# EAGLE board working (EAGLE 6.3), part 1 of 3
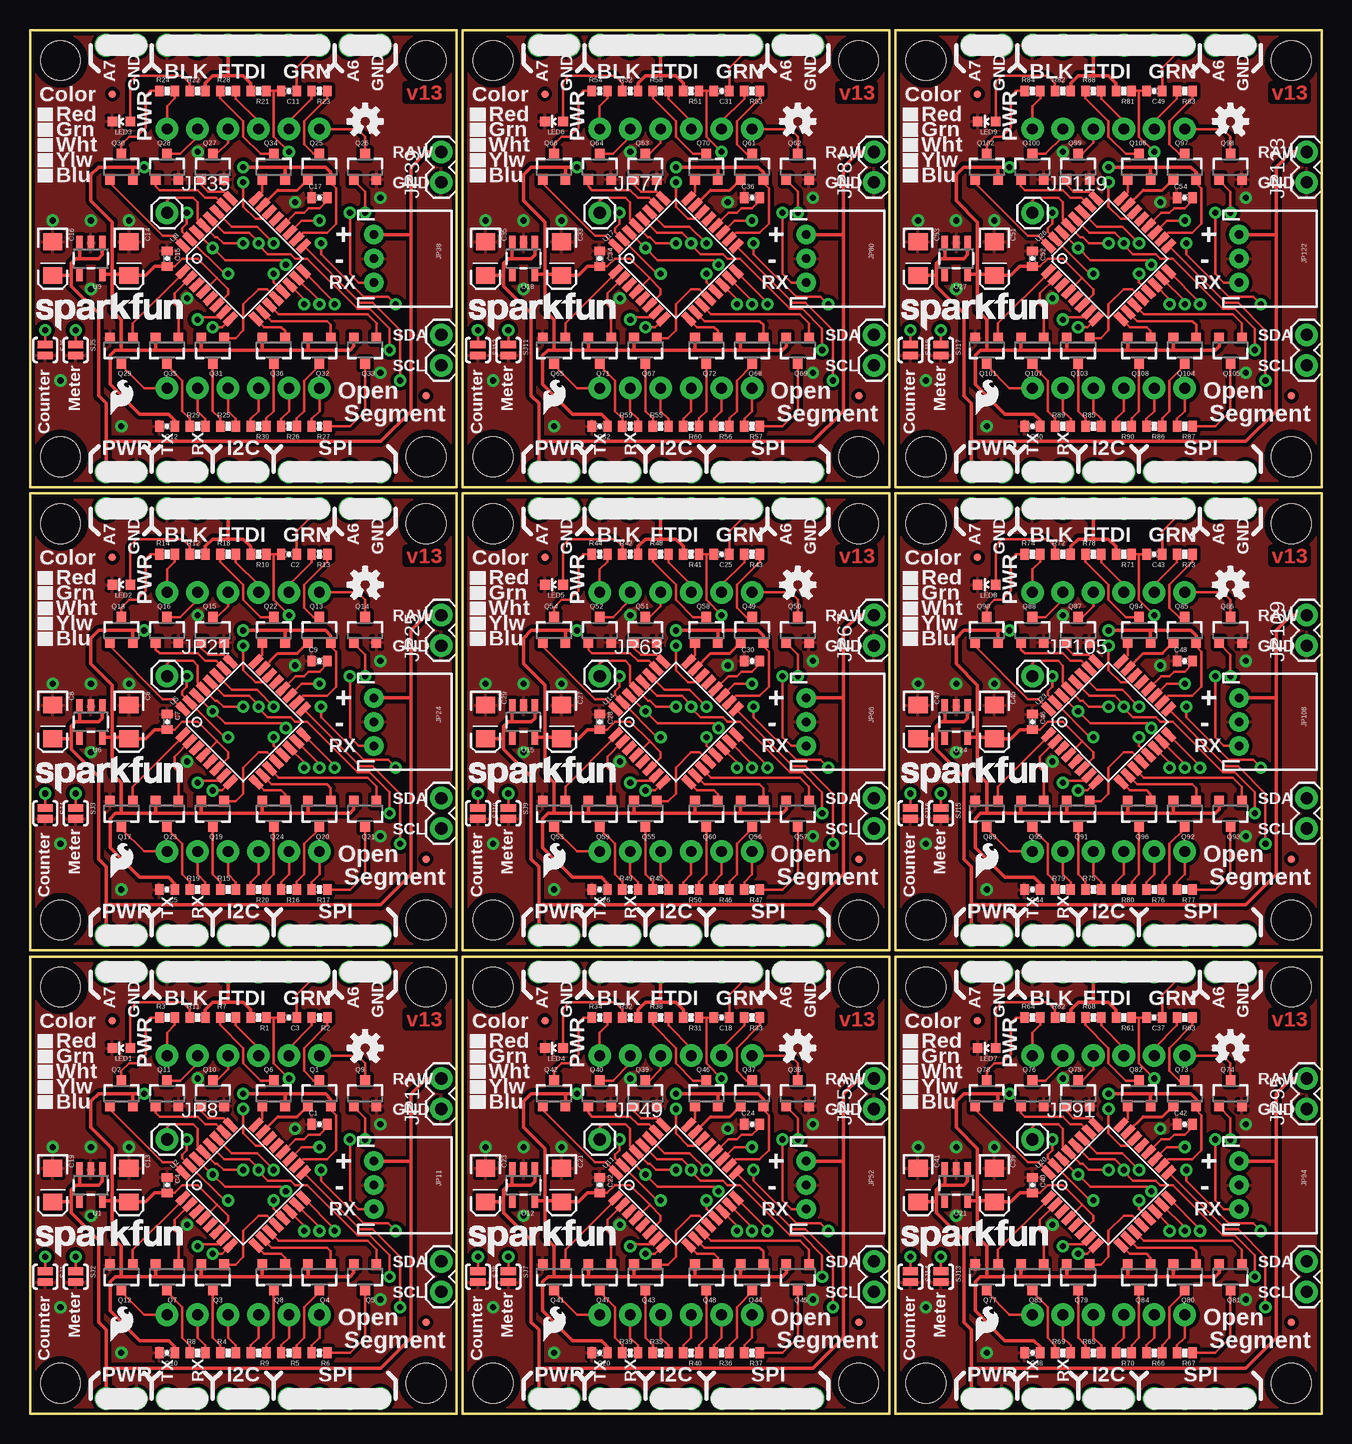
[diagram p0: board, top side]
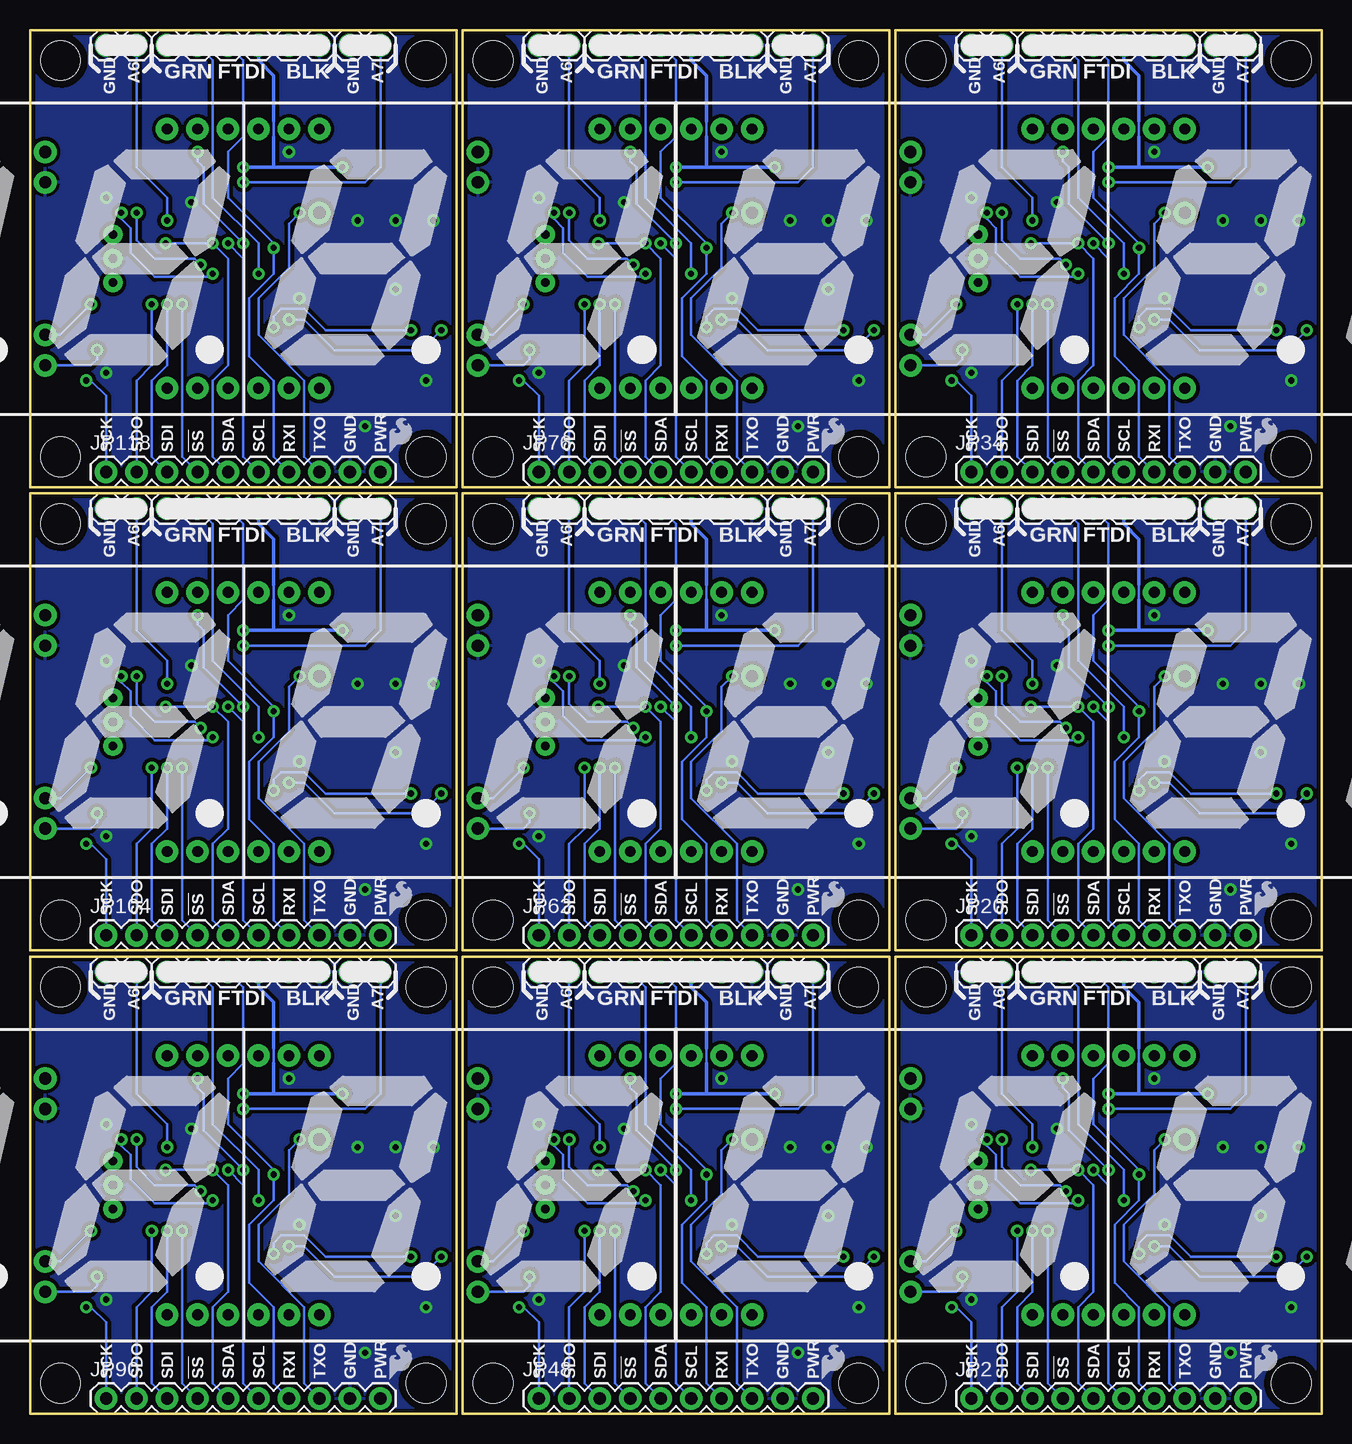
[diagram p1: board, bottom side, seen from below]

Size 107.7 x 115.32 mm. Coordinates in mm from the lower left corner, seen from the top.
Outline: 35.56,38.1 35.56,0 0,0 0,38.1 35.56,38.1
Outline: 35.56,76.71 35.56,38.61 0,38.61 0,76.71 35.56,76.71
Outline: 35.56,115.32 35.56,77.22 0,77.22 0,115.32 35.56,115.32
Outline: 71.63,38.1 71.63,0 36.07,0 36.07,38.1 71.63,38.1
Outline: 71.63,76.71 71.63,38.61 36.07,38.61 36.07,76.71 71.63,76.71
Outline: 71.63,115.32 71.63,77.22 36.07,77.22 36.07,115.32 71.63,115.32
Outline: 107.7,38.1 107.7,0 72.14,0 72.14,38.1 107.7,38.1
Outline: 107.7,76.71 107.7,38.61 72.14,38.61 72.14,76.71 107.7,76.71
Outline: 107.7,115.32 107.7,77.22 72.14,77.22 72.14,115.32 107.7,115.32
Copper layers (1*16): Top 0.035mm / dielectric 1.5mm / Bottom 0.035mm
Design rules "default": minimum track width 8mil, minimum drill 20mil, track to track 8mil, track to pad 8mil, pad to pad 8mil, via to via 8mil, smd to smd 8mil, copper to edge 10mil, drill to drill 8mil, minimum pad ring 12mil, minimum via ring 10mil, stop-mask expansion 4mil, vias tented up to drill 20mil, thermal gap 10mil
Net classes: 0 default: width 0.203 mm

## Footprints (pad centres in the part's own frame; a part is rotated, then mirrored left to right if it is on the bottom)
0402-CAP = smd 0.7 x 0.9: 1 -0.65,0; 2 0.65,0
EIA3216 = smd 1.4 x 1.6: A 1.4,0; C -1.4,0
FTDI_BASIC = drill 1.016 pad 1.88: CTS 10.16,0; DTR 0,0; GND 12.7,0; RXI 2.54,0; TXO 5.08,0; VCC 7.62,0
1X10 = drill 1.016 pad 1.88: 1 0,0; 2 2.54,0; 3 5.08,0; 4 7.62,0; 5 10.16,0; 6 12.7,0; 7 15.24,0; 8 17.78,0; 9 20.32,0; 10 22.86,0
STAND-OFF = hole 3.302: 0,0
MICRO-FIDUCIAL = smd 0.635 x 0.635: 1 0,0
1X01 = drill 1.016 pad 1.88: 1 0,0
1X02 = drill 1.016 pad 1.88: 1 0,0; 2 2.54,0
JST-3-PTH = drill 0.7 pad 1.626: 1 -2,-5; 2 0,-5; 3 2,-5
LED-0603 = smd 0.8 x 0.8: A 0,-0.75; C 0,0.75
SOT23-3 = smd 0.8 x 0.9: 1 -0.95,-1; 2 0.95,-1; 3 0,1.1
0402-RES = smd 0.7 x 0.9: 1 -0.65,0; 2 0.65,0
SJ_2S-NO = smd 0.635 x 1.27: 1 -0.45,0; 2 0.45,0
SOT23-5 = smd 0.55 x 1.2: 1 -0.95,-1.3; 2 0,-1.3; 3 0.95,-1.3; 4 0.95,1.3; 5 -0.95,1.3
TQFP32-08 = smd 1.27 x 0.559: 1 -4.293,2.8; 2 -4.293,2; 3 -4.293,1.2; 4 -4.293,0.4; 5 -4.293,-0.4; 6 -4.293,-1.2; 7 -4.293,-2; 8 -4.293,-2.8; 17 4.293,-2.8; 18 4.293,-2; 19 4.293,-1.2; 20 4.293,-0.4; 21 4.293,0.4; 22 4.293,1.2; 23 4.293,2; 24 4.293,2.8 | smd 0.559 x 1.27: 9 -2.8,-4.293; 10 -2,-4.293; 11 -1.2,-4.293; 12 -0.4,-4.293; 13 0.4,-4.293; 14 1.2,-4.293; 15 2,-4.293; 16 2.8,-4.293; 25 2.8,4.293; 26 2,4.293; 27 1.2,4.293; 28 0.4,4.293; 29 -0.4,4.293; 30 -1.2,4.293; 31 -2,4.293; 32 -2.8,4.293
7-SEGMENT-4DIGIT-COUNTER = drill 0.9 pad 1.88: 1 -6.35,-10.795; 2 -3.81,-10.795; 3 -1.27,-10.795; 4 1.27,-10.795; 5 3.81,-10.795; 6 6.35,-10.795; 7 6.35,10.795; 8 3.81,10.795; 9 1.27,10.795; 10 -1.27,10.795; 11 -3.81,10.795; 12 -6.35,10.795

## Placement (x,y rotation side)
C1  0.1uF  [0402-CAP]  24.13,24.13 0 top
C2  0.1uF  [0402-CAP]  21.59,71.63 180 top
C3  0.1uF  [0402-CAP]  21.59,33.02 180 top
C4  0.1uF  [0402-CAP]  11.43,19.05 270 top
C5  1uF  [0402-CAP]  11.43,43.69 180 top
C6  10uF  [EIA3216]  8.26,57.66 270 top
C7  0.1uF  [0402-CAP]  11.43,57.66 270 top
C8  10uF  [EIA3216]  1.91,57.66 270 top
C9  0.1uF  [0402-CAP]  24.13,62.74 0 top
C10  1uF  [0402-CAP]  11.43,5.08 180 top
C11  0.1uF  [0402-CAP]  21.59,110.24 180 top
C12  1uF  [0402-CAP]  11.43,82.3 180 top
C13  10uF  [EIA3216]  8.26,19.05 270 top
C14  10uF  [EIA3216]  8.26,96.27 270 top
C15  0.1uF  [0402-CAP]  11.43,96.27 270 top
C16  10uF  [EIA3216]  1.91,96.27 270 top
C17  0.1uF  [0402-CAP]  24.13,101.35 0 top
C18  0.1uF  [0402-CAP]  57.66,33.02 180 top
C19  10uF  [EIA3216]  1.91,19.05 270 top
C20  1uF  [0402-CAP]  47.5,5.08 180 top
C21  10uF  [EIA3216]  44.32,19.05 270 top
C22  0.1uF  [0402-CAP]  47.5,19.05 270 top
C23  10uF  [EIA3216]  37.97,19.05 270 top
C24  0.1uF  [0402-CAP]  60.2,24.13 0 top
C25  0.1uF  [0402-CAP]  57.66,71.63 180 top
C26  1uF  [0402-CAP]  47.5,43.69 180 top
C27  10uF  [EIA3216]  44.32,57.66 270 top
C28  0.1uF  [0402-CAP]  47.5,57.66 270 top
C29  10uF  [EIA3216]  37.97,57.66 270 top
C30  0.1uF  [0402-CAP]  60.2,62.74 0 top
C31  0.1uF  [0402-CAP]  57.66,110.24 180 top
C32  1uF  [0402-CAP]  47.5,82.3 180 top
C33  10uF  [EIA3216]  44.32,96.27 270 top
C34  0.1uF  [0402-CAP]  47.5,96.27 270 top
C35  10uF  [EIA3216]  37.97,96.27 270 top
C36  0.1uF  [0402-CAP]  60.2,101.35 0 top
C37  0.1uF  [0402-CAP]  93.73,33.02 180 top
C38  1uF  [0402-CAP]  83.57,5.08 180 top
C39  10uF  [EIA3216]  80.39,19.05 270 top
C40  0.1uF  [0402-CAP]  83.57,19.05 270 top
C41  10uF  [EIA3216]  74.04,19.05 270 top
C42  0.1uF  [0402-CAP]  96.27,24.13 0 top
C43  0.1uF  [0402-CAP]  93.73,71.63 180 top
C44  1uF  [0402-CAP]  83.57,43.69 180 top
C45  10uF  [EIA3216]  80.39,57.66 270 top
C46  0.1uF  [0402-CAP]  83.57,57.66 270 top
C47  10uF  [EIA3216]  74.04,57.66 270 top
C48  0.1uF  [0402-CAP]  96.27,62.74 0 top
C49  0.1uF  [0402-CAP]  93.73,110.24 180 top
C50  1uF  [0402-CAP]  83.57,82.3 180 top
C51  10uF  [EIA3216]  80.39,96.27 270 top
C52  0.1uF  [0402-CAP]  83.57,96.27 270 top
C53  10uF  [EIA3216]  74.04,96.27 270 top
C54  0.1uF  [0402-CAP]  96.27,101.35 0 top
JP1  FTDI_BASIC  [FTDI_BASIC]  24.13,36.83 0 bottom
JP2  Connections  [1X10]  29.21,1.27 0 bottom
JP3  STAND-OFF  [STAND-OFF]  33.02,35.56 0 top
JP4  STAND-OFF  [STAND-OFF]  2.54,35.56 0 top
JP5  STAND-OFF  [STAND-OFF]  33.02,2.54 0 top
JP6  STAND-OFF  [STAND-OFF]  2.54,2.54 0 top
JP7  FIDUCIALUFIDUCIAL  [MICRO-FIDUCIAL]  6.86,32.77 0 top
JP8  RESET  [1X01]  11.43,22.86 0 top
JP9  [1X02]  29.21,36.83 0 bottom
JP10  [1X02]  8.89,36.83 0 bottom
JP11  Serial  [JST-3-PTH]  33.66,19.05 270 top
JP12  [1X02]  34.29,25.4 90 top
JP13  [1X02]  34.29,12.7 270 top
JP14  FIDUCIALUFIDUCIAL  [MICRO-FIDUCIAL]  33.02,7.62 0 top
JP15  FTDI_BASIC  [FTDI_BASIC]  24.13,75.44 0 bottom
JP16  STAND-OFF  [STAND-OFF]  33.02,74.17 0 top
JP17  STAND-OFF  [STAND-OFF]  2.54,74.17 0 top
JP18  STAND-OFF  [STAND-OFF]  33.02,41.15 0 top
JP19  STAND-OFF  [STAND-OFF]  2.54,41.15 0 top
JP20  Connections  [1X10]  29.21,39.88 0 bottom
JP21  RESET  [1X01]  11.43,61.47 0 top
JP22  [1X02]  29.21,75.44 0 bottom
JP23  [1X02]  8.89,75.44 0 bottom
JP24  Serial  [JST-3-PTH]  33.66,57.66 270 top
JP25  [1X02]  34.29,64.01 90 top
JP26  [1X02]  34.29,51.31 270 top
JP27  FIDUCIALUFIDUCIAL  [MICRO-FIDUCIAL]  6.86,71.37 0 top
JP28  FIDUCIALUFIDUCIAL  [MICRO-FIDUCIAL]  33.02,46.23 0 top
JP29  FTDI_BASIC  [FTDI_BASIC]  24.13,114.05 0 bottom
JP30  STAND-OFF  [STAND-OFF]  33.02,112.78 0 top
JP31  STAND-OFF  [STAND-OFF]  2.54,112.78 0 top
JP32  STAND-OFF  [STAND-OFF]  33.02,79.76 0 top
JP33  STAND-OFF  [STAND-OFF]  2.54,79.76 0 top
JP34  Connections  [1X10]  29.21,78.49 0 bottom
JP35  RESET  [1X01]  11.43,100.08 0 top
JP36  [1X02]  29.21,114.05 0 bottom
JP37  [1X02]  8.89,114.05 0 bottom
JP38  Serial  [JST-3-PTH]  33.66,96.27 270 top
JP39  [1X02]  34.29,102.62 90 top
JP40  [1X02]  34.29,89.92 270 top
JP41  FIDUCIALUFIDUCIAL  [MICRO-FIDUCIAL]  6.86,109.98 0 top
JP42  FIDUCIALUFIDUCIAL  [MICRO-FIDUCIAL]  33.02,84.84 0 top
JP43  FTDI_BASIC  [FTDI_BASIC]  60.2,36.83 0 bottom
JP44  STAND-OFF  [STAND-OFF]  69.09,35.56 0 top
JP45  STAND-OFF  [STAND-OFF]  38.61,35.56 0 top
JP46  STAND-OFF  [STAND-OFF]  69.09,2.54 0 top
JP47  STAND-OFF  [STAND-OFF]  38.61,2.54 0 top
JP48  Connections  [1X10]  65.28,1.27 0 bottom
JP49  RESET  [1X01]  47.5,22.86 0 top
JP50  [1X02]  65.28,36.83 0 bottom
JP51  [1X02]  44.96,36.83 0 bottom
JP52  Serial  [JST-3-PTH]  69.72,19.05 270 top
JP53  [1X02]  70.36,25.4 90 top
JP54  [1X02]  70.36,12.7 270 top
JP55  FIDUCIALUFIDUCIAL  [MICRO-FIDUCIAL]  42.93,32.77 0 top
JP56  FIDUCIALUFIDUCIAL  [MICRO-FIDUCIAL]  69.09,7.62 0 top
JP57  FTDI_BASIC  [FTDI_BASIC]  60.2,75.44 0 bottom
JP58  STAND-OFF  [STAND-OFF]  69.09,74.17 0 top
JP59  STAND-OFF  [STAND-OFF]  38.61,74.17 0 top
JP60  STAND-OFF  [STAND-OFF]  69.09,41.15 0 top
JP61  STAND-OFF  [STAND-OFF]  38.61,41.15 0 top
JP62  Connections  [1X10]  65.28,39.88 0 bottom
JP63  RESET  [1X01]  47.5,61.47 0 top
JP64  [1X02]  65.28,75.44 0 bottom
JP65  [1X02]  44.96,75.44 0 bottom
JP66  Serial  [JST-3-PTH]  69.72,57.66 270 top
JP67  [1X02]  70.36,64.01 90 top
JP68  [1X02]  70.36,51.31 270 top
JP69  FIDUCIALUFIDUCIAL  [MICRO-FIDUCIAL]  42.93,71.37 0 top
JP70  FIDUCIALUFIDUCIAL  [MICRO-FIDUCIAL]  69.09,46.23 0 top
JP71  FTDI_BASIC  [FTDI_BASIC]  60.2,114.05 0 bottom
JP72  STAND-OFF  [STAND-OFF]  69.09,112.78 0 top
JP73  STAND-OFF  [STAND-OFF]  38.61,112.78 0 top
JP74  STAND-OFF  [STAND-OFF]  69.09,79.76 0 top
JP75  STAND-OFF  [STAND-OFF]  38.61,79.76 0 top
JP76  Connections  [1X10]  65.28,78.49 0 bottom
JP77  RESET  [1X01]  47.5,100.08 0 top
JP78  [1X02]  65.28,114.05 0 bottom
JP79  [1X02]  44.96,114.05 0 bottom
JP80  Serial  [JST-3-PTH]  69.72,96.27 270 top
JP81  [1X02]  70.36,102.62 90 top
JP82  [1X02]  70.36,89.92 270 top
JP83  FIDUCIALUFIDUCIAL  [MICRO-FIDUCIAL]  42.93,109.98 0 top
JP84  FIDUCIALUFIDUCIAL  [MICRO-FIDUCIAL]  69.09,84.84 0 top
JP85  FTDI_BASIC  [FTDI_BASIC]  96.27,36.83 0 bottom
JP86  STAND-OFF  [STAND-OFF]  105.16,35.56 0 top
JP87  STAND-OFF  [STAND-OFF]  74.68,35.56 0 top
JP88  STAND-OFF  [STAND-OFF]  105.16,2.54 0 top
JP89  STAND-OFF  [STAND-OFF]  74.68,2.54 0 top
JP90  Connections  [1X10]  101.35,1.27 0 bottom
JP91  RESET  [1X01]  83.57,22.86 0 top
JP92  [1X02]  101.35,36.83 0 bottom
JP93  [1X02]  81.03,36.83 0 bottom
JP94  Serial  [JST-3-PTH]  105.79,19.05 270 top
JP95  [1X02]  106.43,25.4 90 top
JP96  [1X02]  106.43,12.7 270 top
JP97  FIDUCIALUFIDUCIAL  [MICRO-FIDUCIAL]  78.99,32.77 0 top
JP98  FIDUCIALUFIDUCIAL  [MICRO-FIDUCIAL]  105.16,7.62 0 top
JP99  FTDI_BASIC  [FTDI_BASIC]  96.27,75.44 0 bottom
JP100  STAND-OFF  [STAND-OFF]  105.16,74.17 0 top
JP101  STAND-OFF  [STAND-OFF]  74.68,74.17 0 top
JP102  STAND-OFF  [STAND-OFF]  105.16,41.15 0 top
JP103  STAND-OFF  [STAND-OFF]  74.68,41.15 0 top
JP104  Connections  [1X10]  101.35,39.88 0 bottom
JP105  RESET  [1X01]  83.57,61.47 0 top
JP106  [1X02]  101.35,75.44 0 bottom
JP107  [1X02]  81.03,75.44 0 bottom
JP108  Serial  [JST-3-PTH]  105.79,57.66 270 top
JP109  [1X02]  106.43,64.01 90 top
JP110  [1X02]  106.43,51.31 270 top
JP111  FIDUCIALUFIDUCIAL  [MICRO-FIDUCIAL]  78.99,71.37 0 top
JP112  FIDUCIALUFIDUCIAL  [MICRO-FIDUCIAL]  105.16,46.23 0 top
JP113  FTDI_BASIC  [FTDI_BASIC]  96.27,114.05 0 bottom
JP114  STAND-OFF  [STAND-OFF]  105.16,112.78 0 top
JP115  STAND-OFF  [STAND-OFF]  74.68,112.78 0 top
JP116  STAND-OFF  [STAND-OFF]  105.16,79.76 0 top
JP117  STAND-OFF  [STAND-OFF]  74.68,79.76 0 top
JP118  Connections  [1X10]  101.35,78.49 0 bottom
JP119  RESET  [1X01]  83.57,100.08 0 top
JP120  [1X02]  101.35,114.05 0 bottom
JP121  [1X02]  81.03,114.05 0 bottom
JP122  Serial  [JST-3-PTH]  105.79,96.27 270 top
JP123  [1X02]  106.43,102.62 90 top
JP124  [1X02]  106.43,89.92 270 top
JP125  FIDUCIALUFIDUCIAL  [MICRO-FIDUCIAL]  78.99,109.98 0 top
JP126  FIDUCIALUFIDUCIAL  [MICRO-FIDUCIAL]  105.16,84.84 0 top
LED1  Red  [LED-0603]  7.62,30.48 90 top
LED2  Red  [LED-0603]  7.62,69.09 90 top
LED3  Red  [LED-0603]  7.62,107.7 90 top
LED4  Red  [LED-0603]  43.69,30.48 90 top
LED5  Red  [LED-0603]  43.69,69.09 90 top
LED6  Red  [LED-0603]  43.69,107.7 90 top
LED7  Red  [LED-0603]  79.76,30.48 90 top
LED8  Red  [LED-0603]  79.76,69.09 90 top
LED9  Red  [LED-0603]  79.76,107.7 90 top
Q1  PNP  [SOT23-3]  24.13,26.67 0 top
Q2  PNP  [SOT23-3]  7.62,26.67 0 top
Q3  PNP  [SOT23-3]  15.24,11.43 180 top
Q4  PNP  [SOT23-3]  24.13,11.43 180 top
Q5  PNP  [SOT23-3]  27.94,11.43 180 top
Q6  PNP  [SOT23-3]  20.32,26.67 0 top
Q7  PNP  [SOT23-3]  11.43,11.43 180 top
Q8  PNP  [SOT23-3]  20.32,11.43 180 top
Q9  MMBT2222  [SOT23-3]  27.94,26.67 0 top
Q10  MMBT2222  [SOT23-3]  15.24,26.67 0 top
Q11  MMBT2222  [SOT23-3]  11.43,26.67 0 top
Q12  MMBT2222  [SOT23-3]  7.62,11.43 180 top
Q13  PNP  [SOT23-3]  24.13,65.28 0 top
Q14  MMBT2222  [SOT23-3]  27.94,65.28 0 top
Q15  MMBT2222  [SOT23-3]  15.24,65.28 0 top
Q16  MMBT2222  [SOT23-3]  11.43,65.28 0 top
Q17  MMBT2222  [SOT23-3]  7.62,50.04 180 top
Q18  PNP  [SOT23-3]  7.62,65.28 0 top
Q19  PNP  [SOT23-3]  15.24,50.04 180 top
Q20  PNP  [SOT23-3]  24.13,50.04 180 top
Q21  PNP  [SOT23-3]  27.94,50.04 180 top
Q22  PNP  [SOT23-3]  20.32,65.28 0 top
Q23  PNP  [SOT23-3]  11.43,50.04 180 top
Q24  PNP  [SOT23-3]  20.32,50.04 180 top
Q25  PNP  [SOT23-3]  24.13,103.89 0 top
Q26  MMBT2222  [SOT23-3]  27.94,103.89 0 top
Q27  MMBT2222  [SOT23-3]  15.24,103.89 0 top
Q28  MMBT2222  [SOT23-3]  11.43,103.89 0 top
Q29  MMBT2222  [SOT23-3]  7.62,88.65 180 top
Q30  PNP  [SOT23-3]  7.62,103.89 0 top
Q31  PNP  [SOT23-3]  15.24,88.65 180 top
Q32  PNP  [SOT23-3]  24.13,88.65 180 top
Q33  PNP  [SOT23-3]  27.94,88.65 180 top
Q34  PNP  [SOT23-3]  20.32,103.89 0 top
Q35  PNP  [SOT23-3]  11.43,88.65 180 top
Q36  PNP  [SOT23-3]  20.32,88.65 180 top
Q37  PNP  [SOT23-3]  60.2,26.67 0 top
Q38  MMBT2222  [SOT23-3]  64.01,26.67 0 top
Q39  MMBT2222  [SOT23-3]  51.31,26.67 0 top
Q40  MMBT2222  [SOT23-3]  47.5,26.67 0 top
Q41  MMBT2222  [SOT23-3]  43.69,11.43 180 top
Q42  PNP  [SOT23-3]  43.69,26.67 0 top
Q43  PNP  [SOT23-3]  51.31,11.43 180 top
Q44  PNP  [SOT23-3]  60.2,11.43 180 top
Q45  PNP  [SOT23-3]  64.01,11.43 180 top
Q46  PNP  [SOT23-3]  56.39,26.67 0 top
Q47  PNP  [SOT23-3]  47.5,11.43 180 top
Q48  PNP  [SOT23-3]  56.39,11.43 180 top
Q49  PNP  [SOT23-3]  60.2,65.28 0 top
Q50  MMBT2222  [SOT23-3]  64.01,65.28 0 top
Q51  MMBT2222  [SOT23-3]  51.31,65.28 0 top
Q52  MMBT2222  [SOT23-3]  47.5,65.28 0 top
Q53  MMBT2222  [SOT23-3]  43.69,50.04 180 top
Q54  PNP  [SOT23-3]  43.69,65.28 0 top
Q55  PNP  [SOT23-3]  51.31,50.04 180 top
Q56  PNP  [SOT23-3]  60.2,50.04 180 top
Q57  PNP  [SOT23-3]  64.01,50.04 180 top
Q58  PNP  [SOT23-3]  56.39,65.28 0 top
Q59  PNP  [SOT23-3]  47.5,50.04 180 top
Q60  PNP  [SOT23-3]  56.39,50.04 180 top
Q61  PNP  [SOT23-3]  60.2,103.89 0 top
Q62  MMBT2222  [SOT23-3]  64.01,103.89 0 top
Q63  MMBT2222  [SOT23-3]  51.31,103.89 0 top
Q64  MMBT2222  [SOT23-3]  47.5,103.89 0 top
Q65  MMBT2222  [SOT23-3]  43.69,88.65 180 top
Q66  PNP  [SOT23-3]  43.69,103.89 0 top
Q67  PNP  [SOT23-3]  51.31,88.65 180 top
Q68  PNP  [SOT23-3]  60.2,88.65 180 top
Q69  PNP  [SOT23-3]  64.01,88.65 180 top
Q70  PNP  [SOT23-3]  56.39,103.89 0 top
Q71  PNP  [SOT23-3]  47.5,88.65 180 top
Q72  PNP  [SOT23-3]  56.39,88.65 180 top
Q73  PNP  [SOT23-3]  96.27,26.67 0 top
Q74  MMBT2222  [SOT23-3]  100.08,26.67 0 top
Q75  MMBT2222  [SOT23-3]  87.38,26.67 0 top
Q76  MMBT2222  [SOT23-3]  83.57,26.67 0 top
Q77  MMBT2222  [SOT23-3]  79.76,11.43 180 top
Q78  PNP  [SOT23-3]  79.76,26.67 0 top
Q79  PNP  [SOT23-3]  87.38,11.43 180 top
Q80  PNP  [SOT23-3]  96.27,11.43 180 top
Q81  PNP  [SOT23-3]  100.08,11.43 180 top
Q82  PNP  [SOT23-3]  92.46,26.67 0 top
Q83  PNP  [SOT23-3]  83.57,11.43 180 top
Q84  PNP  [SOT23-3]  92.46,11.43 180 top
Q85  PNP  [SOT23-3]  96.27,65.28 0 top
Q86  MMBT2222  [SOT23-3]  100.08,65.28 0 top
Q87  MMBT2222  [SOT23-3]  87.38,65.28 0 top
Q88  MMBT2222  [SOT23-3]  83.57,65.28 0 top
Q89  MMBT2222  [SOT23-3]  79.76,50.04 180 top
Q90  PNP  [SOT23-3]  79.76,65.28 0 top
Q91  PNP  [SOT23-3]  87.38,50.04 180 top
Q92  PNP  [SOT23-3]  96.27,50.04 180 top
Q93  PNP  [SOT23-3]  100.08,50.04 180 top
Q94  PNP  [SOT23-3]  92.46,65.28 0 top
Q95  PNP  [SOT23-3]  83.57,50.04 180 top
Q96  PNP  [SOT23-3]  92.46,50.04 180 top
Q97  PNP  [SOT23-3]  96.27,103.89 0 top
Q98  MMBT2222  [SOT23-3]  100.08,103.89 0 top
Q99  MMBT2222  [SOT23-3]  87.38,103.89 0 top
Q100  MMBT2222  [SOT23-3]  83.57,103.89 0 top
Q101  MMBT2222  [SOT23-3]  79.76,88.65 180 top
Q102  PNP  [SOT23-3]  79.76,103.89 0 top
Q103  PNP  [SOT23-3]  87.38,88.65 180 top
Q104  PNP  [SOT23-3]  96.27,88.65 180 top
Q105  PNP  [SOT23-3]  100.08,88.65 180 top
Q106  PNP  [SOT23-3]  92.46,103.89 0 top
Q107  PNP  [SOT23-3]  83.57,88.65 180 top
Q108  PNP  [SOT23-3]  92.46,88.65 180 top
R1  10k  [0402-RES]  19.05,33.02 180 top
R2  27  [0402-RES]  24.13,33.02 180 top
R3  27  [0402-RES]  11.43,33.02 0 top
R4  27  [0402-RES]  16.51,5.08 0 top
R5  27  [0402-RES]  21.59,5.08 180 top
R6  27  [0402-RES]  24.13,5.08 180 top
R7  27  [0402-RES]  16.51,33.02 0 top
R8  27  [0402-RES]  13.97,5.08 0 top
R9  27  [0402-RES]  19.05,5.08 180 top
R10  10k  [0402-RES]  19.05,71.63 180 top
R11  330  [0402-RES]  13.97,33.02 0 top
R12  330  [0402-RES]  13.97,71.63 0 top
R13  27  [0402-RES]  24.13,71.63 180 top
R14  27  [0402-RES]  11.43,71.63 0 top
R15  27  [0402-RES]  16.51,43.69 0 top
R16  27  [0402-RES]  21.59,43.69 180 top
R17  27  [0402-RES]  24.13,43.69 180 top
R18  27  [0402-RES]  16.51,71.63 0 top
R19  27  [0402-RES]  13.97,43.69 0 top
R20  27  [0402-RES]  19.05,43.69 180 top
R21  10k  [0402-RES]  19.05,110.24 180 top
R22  330  [0402-RES]  13.97,110.24 0 top
R23  27  [0402-RES]  24.13,110.24 180 top
R24  27  [0402-RES]  11.43,110.24 0 top
R25  27  [0402-RES]  16.51,82.3 0 top
R26  27  [0402-RES]  21.59,82.3 180 top
R27  27  [0402-RES]  24.13,82.3 180 top
R28  27  [0402-RES]  16.51,110.24 0 top
R29  27  [0402-RES]  13.97,82.3 0 top
R30  27  [0402-RES]  19.05,82.3 180 top
R31  10k  [0402-RES]  55.12,33.02 180 top
R32  330  [0402-RES]  50.04,33.02 0 top
R33  27  [0402-RES]  60.2,33.02 180 top
R34  27  [0402-RES]  47.5,33.02 0 top
R35  27  [0402-RES]  52.58,5.08 0 top
R36  27  [0402-RES]  57.66,5.08 180 top
R37  27  [0402-RES]  60.2,5.08 180 top
R38  27  [0402-RES]  52.58,33.02 0 top
R39  27  [0402-RES]  50.04,5.08 0 top
R40  27  [0402-RES]  55.12,5.08 180 top
R41  10k  [0402-RES]  55.12,71.63 180 top
R42  330  [0402-RES]  50.04,71.63 0 top
R43  27  [0402-RES]  60.2,71.63 180 top
R44  27  [0402-RES]  47.5,71.63 0 top
R45  27  [0402-RES]  52.58,43.69 0 top
R46  27  [0402-RES]  57.66,43.69 180 top
R47  27  [0402-RES]  60.2,43.69 180 top
R48  27  [0402-RES]  52.58,71.63 0 top
R49  27  [0402-RES]  50.04,43.69 0 top
R50  27  [0402-RES]  55.12,43.69 180 top
R51  10k  [0402-RES]  55.12,110.24 180 top
R52  330  [0402-RES]  50.04,110.24 0 top
R53  27  [0402-RES]  60.2,110.24 180 top
R54  27  [0402-RES]  47.5,110.24 0 top
R55  27  [0402-RES]  52.58,82.3 0 top
R56  27  [0402-RES]  57.66,82.3 180 top
R57  27  [0402-RES]  60.2,82.3 180 top
R58  27  [0402-RES]  52.58,110.24 0 top
R59  27  [0402-RES]  50.04,82.3 0 top
R60  27  [0402-RES]  55.12,82.3 180 top
R61  10k  [0402-RES]  91.19,33.02 180 top
R62  330  [0402-RES]  86.11,33.02 0 top
R63  27  [0402-RES]  96.27,33.02 180 top
R64  27  [0402-RES]  83.57,33.02 0 top
R65  27  [0402-RES]  88.65,5.08 0 top
R66  27  [0402-RES]  93.73,5.08 180 top
R67  27  [0402-RES]  96.27,5.08 180 top
R68  27  [0402-RES]  88.65,33.02 0 top
R69  27  [0402-RES]  86.11,5.08 0 top
R70  27  [0402-RES]  91.19,5.08 180 top
R71  10k  [0402-RES]  91.19,71.63 180 top
R72  330  [0402-RES]  86.11,71.63 0 top
R73  27  [0402-RES]  96.27,71.63 180 top
R74  27  [0402-RES]  83.57,71.63 0 top
R75  27  [0402-RES]  88.65,43.69 0 top
R76  27  [0402-RES]  93.73,43.69 180 top
R77  27  [0402-RES]  96.27,43.69 180 top
R78  27  [0402-RES]  88.65,71.63 0 top
R79  27  [0402-RES]  86.11,43.69 0 top
R80  27  [0402-RES]  91.19,43.69 180 top
R81  10k  [0402-RES]  91.19,110.24 180 top
R82  330  [0402-RES]  86.11,110.24 0 top
R83  27  [0402-RES]  96.27,110.24 180 top
R84  27  [0402-RES]  83.57,110.24 0 top
R85  27  [0402-RES]  88.65,82.3 0 top
R86  27  [0402-RES]  93.73,82.3 180 top
R87  27  [0402-RES]  96.27,82.3 180 top
R88  27  [0402-RES]  88.65,110.24 0 top
R89  27  [0402-RES]  86.11,82.3 0 top
R90  27  [0402-RES]  91.19,82.3 180 top
SJ1  Counter Ctl  [SJ_2S-NO]  1.27,11.43 270 top
SJ2  Counter Ctl  [SJ_2S-NO]  3.81,11.43 270 top
SJ3  Counter Ctl  [SJ_2S-NO]  3.81,50.04 270 top
SJ4  Counter Ctl  [SJ_2S-NO]  1.27,50.04 270 top
SJ5  Counter Ctl  [SJ_2S-NO]  3.81,88.65 270 top
SJ6  Counter Ctl  [SJ_2S-NO]  1.27,88.65 270 top
SJ7  Counter Ctl  [SJ_2S-NO]  39.88,11.43 270 top
SJ8  Counter Ctl  [SJ_2S-NO]  37.34,11.43 270 top
SJ9  Counter Ctl  [SJ_2S-NO]  39.88,50.04 270 top
SJ10  Counter Ctl  [SJ_2S-NO]  37.34,50.04 270 top
SJ11  Counter Ctl  [SJ_2S-NO]  39.88,88.65 270 top
SJ12  Counter Ctl  [SJ_2S-NO]  37.34,88.65 270 top
SJ13  Counter Ctl  [SJ_2S-NO]  75.95,11.43 270 top
SJ14  Counter Ctl  [SJ_2S-NO]  73.41,11.43 270 top
SJ15  Counter Ctl  [SJ_2S-NO]  75.95,50.04 270 top
SJ16  Counter Ctl  [SJ_2S-NO]  73.41,50.04 270 top
SJ17  Counter Ctl  [SJ_2S-NO]  75.95,88.65 270 top
SJ18  Counter Ctl  [SJ_2S-NO]  73.41,88.65 270 top
U1  MIC5219  [SOT23-5]  5.08,19.05 180 top
U2  ATMEGA328  [TQFP32-08]  17.78,19.05 45 top
U3  7-SEGMENT-4DIGIT-COUNTERPTH  [7-SEGMENT-4DIGIT-COUNTER]  17.78,19.05 0 bottom
U4  7-SEGMENT-4DIGIT-COUNTERPTH  [7-SEGMENT-4DIGIT-COUNTER]  17.78,57.66 0 bottom
U5  ATMEGA328  [TQFP32-08]  17.78,57.66 45 top
U6  MIC5219  [SOT23-5]  5.08,57.66 180 top
U7  7-SEGMENT-4DIGIT-COUNTERPTH  [7-SEGMENT-4DIGIT-COUNTER]  17.78,96.27 0 bottom
U8  ATMEGA328  [TQFP32-08]  17.78,96.27 45 top
U9  MIC5219  [SOT23-5]  5.08,96.27 180 top
U10  7-SEGMENT-4DIGIT-COUNTERPTH  [7-SEGMENT-4DIGIT-COUNTER]  53.85,19.05 0 bottom
U11  ATMEGA328  [TQFP32-08]  53.85,19.05 45 top
U12  MIC5219  [SOT23-5]  41.15,19.05 180 top
U13  7-SEGMENT-4DIGIT-COUNTERPTH  [7-SEGMENT-4DIGIT-COUNTER]  53.85,57.66 0 bottom
U14  ATMEGA328  [TQFP32-08]  53.85,57.66 45 top
U15  MIC5219  [SOT23-5]  41.15,57.66 180 top
U16  7-SEGMENT-4DIGIT-COUNTERPTH  [7-SEGMENT-4DIGIT-COUNTER]  53.85,96.27 0 bottom
U17  ATMEGA328  [TQFP32-08]  53.85,96.27 45 top
U18  MIC5219  [SOT23-5]  41.15,96.27 180 top
U19  7-SEGMENT-4DIGIT-COUNTERPTH  [7-SEGMENT-4DIGIT-COUNTER]  89.92,19.05 0 bottom
U20  ATMEGA328  [TQFP32-08]  89.92,19.05 45 top
U21  MIC5219  [SOT23-5]  77.22,19.05 180 top
U22  7-SEGMENT-4DIGIT-COUNTERPTH  [7-SEGMENT-4DIGIT-COUNTER]  89.92,57.66 0 bottom
U23  ATMEGA328  [TQFP32-08]  89.92,57.66 45 top
U24  MIC5219  [SOT23-5]  77.22,57.66 180 top
U25  7-SEGMENT-4DIGIT-COUNTERPTH  [7-SEGMENT-4DIGIT-COUNTER]  89.92,96.27 0 bottom
U26  ATMEGA328  [TQFP32-08]  89.92,96.27 45 top
U27  MIC5219  [SOT23-5]  77.22,96.27 180 top
U$1  LOGO-SFESK  [SFE-LOGO-FLAME]  5.59,2.92 0 bottom
U$2  LOGO-SFESK  [SFE-LOGO-FLAME]  6.73,6.1 0 top
U$3  LOGO-SFENW2  [SFE-NEW-WEB]  0.51,51.69 0 top
U$4  OSHW-LOGOS  [OSHW-LOGO-S]  27.94,30.48 0 top
U$5  LOGO-SFESK  [SFE-LOGO-FLAME]  5.59,41.53 0 bottom
U$6  LOGO-SFESK  [SFE-LOGO-FLAME]  6.73,44.7 0 top
U$7  LOGO-SFENW2  [SFE-NEW-WEB]  0.51,13.08 0 top
U$8  OSHW-LOGOS  [OSHW-LOGO-S]  27.94,69.09 0 top
U$9  LOGO-SFENW2  [SFE-NEW-WEB]  0.51,90.3 0 top
U$10  LOGO-SFESK  [SFE-LOGO-FLAME]  5.59,80.14 0 bottom
U$11  LOGO-SFESK  [SFE-LOGO-FLAME]  6.73,83.31 0 top
U$12  OSHW-LOGOS  [OSHW-LOGO-S]  27.94,107.7 0 top
U$13  LOGO-SFENW2  [SFE-NEW-WEB]  36.58,13.08 0 top
U$14  LOGO-SFESK  [SFE-LOGO-FLAME]  41.66,2.92 0 bottom
U$15  LOGO-SFESK  [SFE-LOGO-FLAME]  42.8,6.1 0 top
U$16  OSHW-LOGOS  [OSHW-LOGO-S]  64.01,30.48 0 top
U$17  LOGO-SFENW2  [SFE-NEW-WEB]  36.58,51.69 0 top
U$18  LOGO-SFESK  [SFE-LOGO-FLAME]  41.66,41.53 0 bottom
U$19  LOGO-SFESK  [SFE-LOGO-FLAME]  42.8,44.7 0 top
U$20  OSHW-LOGOS  [OSHW-LOGO-S]  64.01,69.09 0 top
U$21  LOGO-SFENW2  [SFE-NEW-WEB]  36.58,90.3 0 top
U$22  LOGO-SFESK  [SFE-LOGO-FLAME]  41.66,80.14 0 bottom
U$23  LOGO-SFESK  [SFE-LOGO-FLAME]  42.8,83.31 0 top
U$24  OSHW-LOGOS  [OSHW-LOGO-S]  64.01,107.7 0 top
U$25  LOGO-SFENW2  [SFE-NEW-WEB]  72.64,13.08 0 top
U$26  LOGO-SFESK  [SFE-LOGO-FLAME]  77.72,2.92 0 bottom
U$27  LOGO-SFESK  [SFE-LOGO-FLAME]  78.87,6.1 0 top
U$28  OSHW-LOGOS  [OSHW-LOGO-S]  100.08,30.48 0 top
U$29  LOGO-SFENW2  [SFE-NEW-WEB]  72.64,51.69 0 top
U$30  LOGO-SFESK  [SFE-LOGO-FLAME]  77.72,41.53 0 bottom
U$31  LOGO-SFESK  [SFE-LOGO-FLAME]  78.87,44.7 0 top
U$32  OSHW-LOGOS  [OSHW-LOGO-S]  100.08,69.09 0 top
U$33  LOGO-SFENW2  [SFE-NEW-WEB]  72.64,90.3 0 top
U$34  LOGO-SFESK  [SFE-LOGO-FLAME]  77.72,80.14 0 bottom
U$35  LOGO-SFESK  [SFE-LOGO-FLAME]  78.87,83.31 0 top
U$36  OSHW-LOGOS  [OSHW-LOGO-S]  100.08,107.7 0 top

## Library data of the parts
C1-C54 JP1 JP7 JP14 JP15 JP27-JP29 JP41-JP43 JP55-JP57 JP69-JP71 JP83-JP85 JP97-JP99 JP111-JP113 JP125 JP126 LED1-LED9 R1-R90 U1 U6 U9 U12 U15 U18 U21 U24 U27 U$1-U$3 U$5-U$7 U$9-U$11 U$13-U$15 U$17-U$19 U$21-U$23 U$25-U$27 U$29-U$31 U$33-U$35 = SparkFun
JP2 JP8-JP13 JP20-JP26 JP34-JP40 JP48-JP54 JP62-JP68 JP76-JP82 JP90-JP96 JP104-JP110 JP118-JP124 = SparkFun-Connectors
JP3-JP6 JP16-JP19 JP30-JP33 JP44-JP47 JP58-JP61 JP72-JP75 JP86-JP89 JP100-JP103 JP114-JP117 = SparkFun-Electromechanical
Q1-Q108 = SparkFun-DiscreteSemi
SJ1-SJ18 = SparkFun-Passives
U2 U5 U8 U11 U14 U17 U20 U23 U26 = SparkFun-DigitalIC
U3 U4 U7 U10 U13 U16 U19 U22 U25 = SparkFun-Displays
U$4 U$8 U$12 U$16 U$20 U$24 U$28 U$32 U$36 = SparkFun-Aesthetics

## Nets
!SS: JP2.4 U2.14
!SS1: JP20.4 U5.14
!SS2: JP34.4 U8.14
!SS3: JP48.4 U11.14
!SS4: JP62.4 U14.14
!SS5: JP76.4 U17.14
!SS6: JP90.4 U20.14
!SS7: JP104.4 U23.14
!SS8: JP118.4 U26.14
A1: JP22.2 U5.19
A2: JP23.2 U5.22
A3: JP36.2 U8.19
A4: JP37.2 U8.22
A5: JP50.2 U11.19
A6: JP9.2 U2.19
A7: JP10.2 U2.22
A8: JP51.2 U11.22
A9: JP64.2 U14.19
A10: JP65.2 U14.22
A11: JP78.2 U17.19
A12: JP79.2 U17.22
A13: JP92.2 U20.19
A14: JP93.2 U20.22
A15: JP106.2 U23.19
A16: JP107.2 U23.22
A17: JP120.2 U26.19
A18: JP121.2 U26.22
ANALOG: SJ2.1 U2.8
ANALOG1: SJ3.1 U5.8
ANALOG2: SJ5.1 U8.8
ANALOG3: SJ7.1 U11.8
ANALOG4: SJ9.1 U14.8
ANALOG5: SJ11.1 U17.8
ANALOG6: SJ13.1 U20.8
ANALOG7: SJ15.1 U23.8
ANALOG8: SJ17.1 U26.8
C-DIG1: Q9.1 U2.13
C-DIG2: Q10.1 U2.25
C-DIG3: Q11.1 U2.26
C-DIG4: Q12.1 U2.1
C-DIG5: Q14.1 U5.13
C-DIG6: Q15.1 U5.25
C-DIG7: Q16.1 U5.26
C-DIG8: Q17.1 U5.1
C-DIG9: Q26.1 U8.13
C-DIG10: Q27.1 U8.25
C-DIG11: Q28.1 U8.26
C-DIG12: Q29.1 U8.1
C-DIG13: Q38.1 U11.13
C-DIG14: Q39.1 U11.25
C-DIG15: Q40.1 U11.26
C-DIG16: Q41.1 U11.1
C-DIG17: Q50.1 U14.13
C-DIG18: Q51.1 U14.25
C-DIG19: Q52.1 U14.26
C-DIG20: Q53.1 U14.1
C-DIG21: Q62.1 U17.13
C-DIG22: Q63.1 U17.25
C-DIG23: Q64.1 U17.26
C-DIG24: Q65.1 U17.1
C-DIG25: Q74.1 U20.13
C-DIG26: Q75.1 U20.25
C-DIG27: Q76.1 U20.26
C-DIG28: Q77.1 U20.1
C-DIG29: Q86.1 U23.13
C-DIG30: Q87.1 U23.25
C-DIG31: Q88.1 U23.26
C-DIG32: Q89.1 U23.1
C-DIG33: Q98.1 U26.13
C-DIG34: Q99.1 U26.25
C-DIG35: Q100.1 U26.26
C-DIG36: Q101.1 U26.1
C-SEGA: Q1.1 U2.23
C-SEGA1: Q13.1 U5.23
C-SEGA2: Q25.1 U8.23
C-SEGA3: Q37.1 U11.23
C-SEGA4: Q49.1 U14.23
C-SEGA5: Q61.1 U17.23
C-SEGA6: Q73.1 U20.23
C-SEGA7: Q85.1 U23.23
C-SEGA8: Q97.1 U26.23
C-SEGB: Q2.1 U2.32
C-SEGB1: Q18.1 U5.32
C-SEGB2: Q30.1 U8.32
C-SEGB3: Q42.1 U11.32
C-SEGB4: Q54.1 U14.32
C-SEGB5: Q66.1 U17.32
C-SEGB6: Q78.1 U20.32
C-SEGB7: Q90.1 U23.32
C-SEGB8: Q102.1 U26.32
C-SEGC: Q3.1 U2.12
C-SEGC1: Q19.1 U5.12
C-SEGC2: Q31.1 U8.12
C-SEGC3: Q43.1 U11.12
C-SEGC4: Q55.1 U14.12
C-SEGC5: Q67.1 U17.12
C-SEGC6: Q79.1 U20.12
C-SEGC7: Q91.1 U23.12
C-SEGC8: Q103.1 U26.12
C-SEGD: Q4.1 U2.10
C-SEGD1: Q20.1 U5.10
C-SEGD2: Q32.1 U8.10
C-SEGD3: Q44.1 U11.10
C-SEGD4: Q56.1 U14.10
C-SEGD5: Q68.1 U17.10
C-SEGD6: Q80.1 U20.10
C-SEGD7: Q92.1 U23.10
C-SEGD8: Q104.1 U26.10
C-SEGDP: Q8.1 U2.9
C-SEGDP1: Q24.1 U5.9
C-SEGDP2: Q36.1 U8.9
C-SEGDP3: Q48.1 U11.9
C-SEGDP4: Q60.1 U14.9
C-SEGDP5: Q72.1 U17.9
C-SEGDP6: Q84.1 U20.9
C-SEGDP7: Q96.1 U23.9
C-SEGDP8: Q108.1 U26.9
C-SEGE: Q5.1 U2.11
C-SEGE1: Q21.1 U5.11
C-SEGE2: Q33.1 U8.11
C-SEGE3: Q45.1 U11.11
C-SEGE4: Q57.1 U14.11
C-SEGE5: Q69.1 U17.11
C-SEGE6: Q81.1 U20.11
C-SEGE7: Q93.1 U23.11
C-SEGE8: Q105.1 U26.11
C-SEGF: Q6.1 U2.24
C-SEGF1: Q22.1 U5.24
C-SEGF2: Q34.1 U8.24
C-SEGF3: Q46.1 U11.24
C-SEGF4: Q58.1 U14.24
C-SEGF5: Q70.1 U17.24
C-SEGF6: Q82.1 U20.24
C-SEGF7: Q94.1 U23.24
C-SEGF8: Q106.1 U26.24
C-SEGG: Q7.1 U2.2
C-SEGG1: Q23.1 U5.2
C-SEGG2: Q35.1 U8.2
C-SEGG3: Q47.1 U11.2
C-SEGG4: Q59.1 U14.2
C-SEGG5: Q71.1 U17.2
C-SEGG6: Q83.1 U20.2
C-SEGG7: Q95.1 U23.2
C-SEGG8: Q107.1 U26.2
COUNTER: SJ1.1 U2.7
COUNTER1: SJ4.1 U5.7
COUNTER2: SJ6.1 U8.7
COUNTER3: SJ8.1 U11.7
COUNTER4: SJ10.1 U14.7
COUNTER5: SJ12.1 U17.7
COUNTER6: SJ14.1 U20.7
COUNTER7: SJ16.1 U23.7
COUNTER8: SJ18.1 U26.7
DIG1: Q9.3 U3.12
DIG2: Q10.3 U3.9
DIG3: Q11.3 U3.8
DIG4: Q12.3 U3.6
DIG5: Q14.3 U4.12
DIG6: Q15.3 U4.9
DIG7: Q16.3 U4.8
DIG8: Q17.3 U4.6
DIG9: Q26.3 U7.12
DIG10: Q27.3 U7.9
DIG11: Q28.3 U7.8
DIG12: Q29.3 U7.6
DIG13: Q38.3 U10.12
DIG14: Q39.3 U10.9
DIG15: Q40.3 U10.8
DIG16: Q41.3 U10.6
DIG17: Q50.3 U13.12
DIG18: Q51.3 U13.9
DIG19: Q52.3 U13.8
DIG20: Q53.3 U13.6
DIG21: Q62.3 U16.12
DIG22: Q63.3 U16.9
DIG23: Q64.3 U16.8
DIG24: Q65.3 U16.6
DIG25: Q74.3 U19.12
DIG26: Q75.3 U19.9
DIG27: Q76.3 U19.8
DIG28: Q77.3 U19.6
DIG29: Q86.3 U22.12
DIG30: Q87.3 U22.9
DIG31: Q88.3 U22.8
DIG32: Q89.3 U22.6
DIG33: Q98.3 U25.12
DIG34: Q99.3 U25.9
DIG35: Q100.3 U25.8
DIG36: Q101.3 U25.6
GND: C1.1 C4.1 C10.2 C13.C C19.C JP1.GND JP2.9 JP9.1 JP10.1 JP11.2 JP12.1 LED1.C Q9.2 Q10.2 Q11.2 Q12.2 SJ1.2 SJ2.2 U1.2 U2.3 U2.5 U2.21
GND1: C5.2 C6.C C7.1 C8.C C9.1 JP15.GND JP20.9 JP22.1 JP23.1 JP24.2 JP25.1 LED2.C Q14.2 Q15.2 Q16.2 Q17.2 SJ3.2 SJ4.2 U5.3 U5.5 U5.21 U6.2
GND2: C12.2 C14.C C15.1 C16.C C17.1 JP29.GND JP34.9 JP36.1 JP37.1 JP38.2 JP39.1 LED3.C Q26.2 Q27.2 Q28.2 Q29.2 SJ5.2 SJ6.2 U8.3 U8.5 U8.21 U9.2
GND3: C20.2 C21.C C22.1 C23.C C24.1 JP43.GND JP48.9 JP50.1 JP51.1 JP52.2 JP53.1 LED4.C Q38.2 Q39.2 Q40.2 Q41.2 SJ7.2 SJ8.2 U11.3 U11.5 U11.21 U12.2
GND4: C26.2 C27.C C28.1 C29.C C30.1 JP57.GND JP62.9 JP64.1 JP65.1 JP66.2 JP67.1 LED5.C Q50.2 Q51.2 Q52.2 Q53.2 SJ9.2 SJ10.2 U14.3 U14.5 U14.21 U15.2
GND5: C32.2 C33.C C34.1 C35.C C36.1 JP71.GND JP76.9 JP78.1 JP79.1 JP80.2 JP81.1 LED6.C Q62.2 Q63.2 Q64.2 Q65.2 SJ11.2 SJ12.2 U17.3 U17.5 U17.21 U18.2
GND6: C38.2 C39.C C40.1 C41.C C42.1 JP85.GND JP90.9 JP92.1 JP93.1 JP94.2 JP95.1 LED7.C Q74.2 Q75.2 Q76.2 Q77.2 SJ13.2 SJ14.2 U20.3 U20.5 U20.21 U21.2
GND7: C44.2 C45.C C46.1 C47.C C48.1 JP99.GND JP104.9 JP106.1 JP107.1 JP108.2 JP109.1 LED8.C Q86.2 Q87.2 Q88.2 Q89.2 SJ15.2 SJ16.2 U23.3 U23.5 U23.21 U24.2
GND8: C50.2 C51.C C52.1 C53.C C54.1 JP113.GND JP118.9 JP120.1 JP121.1 JP122.2 JP123.1 LED9.C Q98.2 Q99.2 Q100.2 Q101.2 SJ17.2 SJ18.2 U26.3 U26.5 U26.21 U27.2
N$1: Q1.3 R2.1
N$2: C2.1 JP15.DTR
N$3: C3.1 JP1.DTR
N$4: Q2.3 R3.1
N$5: Q3.3 R4.1
N$6: Q4.3 R5.1
N$7: Q5.3 R6.1
N$8: Q6.3 R7.1
N$9: Q7.3 R8.1
N$10: Q8.3 R9.1
N$11: C1.2 U2.20
N$12: LED2.A R12.1
N$13: Q13.3 R13.1
N$14: Q18.3 R14.1
N$15: Q19.3 R15.1
N$16: Q20.3 R16.1
N$17: Q21.3 R17.1
N$18: Q22.3 R18.1
N$19: Q23.3 R19.1
N$20: Q24.3 R20.1
N$21: C9.2 U5.20
N$22: C11.1 JP29.DTR
N$23: LED3.A R22.1
N$24: Q25.3 R23.1
N$25: Q30.3 R24.1
N$26: Q31.3 R25.1
N$27: Q32.3 R26.1
N$28: Q33.3 R27.1
N$29: Q34.3 R28.1
N$30: Q35.3 R29.1
N$31: Q36.3 R30.1
N$32: C17.2 U8.20
N$33: C18.1 JP43.DTR
N$34: LED4.A R32.1
N$35: Q37.3 R33.1
N$36: Q42.3 R34.1
N$37: Q43.3 R35.1
N$38: LED1.A R11.1
N$39: Q44.3 R36.1
N$40: Q45.3 R37.1
N$41: Q46.3 R38.1
N$42: Q47.3 R39.1
N$43: Q48.3 R40.1
N$44: C24.2 U11.20
N$45: C25.1 JP57.DTR
N$46: LED5.A R42.1
N$47: Q49.3 R43.1
N$48: Q54.3 R44.1
N$49: Q55.3 R45.1
N$50: Q56.3 R46.1
N$51: Q57.3 R47.1
N$52: Q58.3 R48.1
N$53: Q59.3 R49.1
N$54: Q60.3 R50.1
N$55: C30.2 U14.20
N$56: C31.1 JP71.DTR
N$57: LED6.A R52.1
N$58: Q61.3 R53.1
N$59: Q66.3 R54.1
N$60: Q67.3 R55.1
N$61: Q68.3 R56.1
N$62: Q69.3 R57.1
N$63: Q70.3 R58.1
N$64: Q71.3 R59.1
N$65: Q72.3 R60.1
N$66: C36.2 U17.20
N$67: C37.1 JP85.DTR
N$68: LED7.A R62.1
N$69: Q73.3 R63.1
N$70: Q78.3 R64.1
N$71: Q79.3 R65.1
N$72: Q80.3 R66.1
N$73: Q81.3 R67.1
N$74: Q82.3 R68.1
N$75: Q83.3 R69.1
N$76: Q84.3 R70.1
N$77: C42.2 U20.20
N$78: C43.1 JP99.DTR
N$79: LED8.A R72.1
N$80: Q85.3 R73.1
N$81: Q90.3 R74.1
N$82: Q91.3 R75.1
N$83: Q92.3 R76.1
N$84: Q93.3 R77.1
N$85: Q94.3 R78.1
N$86: Q95.3 R79.1
N$87: Q96.3 R80.1
N$88: C48.2 U23.20
N$89: C49.1 JP113.DTR
N$90: LED9.A R82.1
N$91: Q97.3 R83.1
N$92: Q102.3 R84.1
N$93: Q103.3 R85.1
N$94: Q104.3 R86.1
N$95: Q105.3 R87.1
N$96: Q106.3 R88.1
N$97: Q107.3 R89.1
N$98: Q108.3 R90.1
N$99: C54.2 U26.20
RAW [vcc]: C19.A JP2.10 JP11.1 JP12.2 U1.1 U1.3
RAW1 [vcc]: C8.A JP20.10 JP24.1 JP25.2 U6.1 U6.3
RAW2 [vcc]: C16.A JP34.10 JP38.1 JP39.2 U9.1 U9.3
RAW3 [vcc]: C23.A JP48.10 JP52.1 JP53.2 U12.1 U12.3
RAW4 [vcc]: C29.A JP62.10 JP66.1 JP67.2 U15.1 U15.3
RAW5 [vcc]: C35.A JP76.10 JP80.1 JP81.2 U18.1 U18.3
RAW6 [vcc]: C41.A JP90.10 JP94.1 JP95.2 U21.1 U21.3
RAW7 [vcc]: C47.A JP104.10 JP108.1 JP109.2 U24.1 U24.3
RAW8 [vcc]: C53.A JP118.10 JP122.1 JP123.2 U27.1 U27.3
RST: C3.2 JP8.1 R1.1 U2.29
RST1: C2.2 JP21.1 R10.1 U5.29
RST2: C11.2 JP35.1 R21.1 U8.29
RST3: C18.2 JP49.1 R31.1 U11.29
RST4: C25.2 JP63.1 R41.1 U14.29
RST5: C31.2 JP77.1 R51.1 U17.29
RST6: C37.2 JP91.1 R61.1 U20.29
RST7: C43.2 JP105.1 R71.1 U23.29
RST8: C49.2 JP119.1 R81.1 U26.29
RXI: JP1.TXO JP2.7 JP11.3 U2.30
RXI1: JP15.TXO JP20.7 JP24.3 U5.30
RXI2: JP29.TXO JP34.7 JP38.3 U8.30
RXI3: JP43.TXO JP48.7 JP52.3 U11.30
RXI4: JP57.TXO JP62.7 JP66.3 U14.30
RXI5: JP71.TXO JP76.7 JP80.3 U17.30
RXI6: JP85.TXO JP90.7 JP94.3 U20.30
RXI7: JP99.TXO JP104.7 JP108.3 U23.30
RXI8: JP113.TXO JP118.7 JP122.3 U26.30
SCK: JP2.1 U2.17
SCK1: JP20.1 U5.17
SCK2: JP34.1 U8.17
SCK3: JP48.1 U11.17
SCK4: JP62.1 U14.17
SCK5: JP76.1 U17.17
SCK6: JP90.1 U20.17
SCK7: JP104.1 U23.17
SCK8: JP118.1 U26.17
SCL: JP2.6 JP13.2 U2.28
SCL1: JP20.6 JP26.2 U5.28
SCL2: JP34.6 JP40.2 U8.28
SCL3: JP48.6 JP54.2 U11.28
SCL4: JP62.6 JP68.2 U14.28
SCL5: JP76.6 JP82.2 U17.28
SCL6: JP90.6 JP96.2 U20.28
SCL7: JP104.6 JP110.2 U23.28
SCL8: JP118.6 JP124.2 U26.28
SDA: JP2.5 JP13.1 U2.27
SDA1: JP20.5 JP26.1 U5.27
SDA2: JP34.5 JP40.1 U8.27
SDA3: JP48.5 JP54.1 U11.27
SDA4: JP62.5 JP68.1 U14.27
SDA5: JP76.5 JP82.1 U17.27
SDA6: JP90.5 JP96.1 U20.27
SDA7: JP104.5 JP110.1 U23.27
SDA8: JP118.5 JP124.1 U26.27
SDI: JP2.3 U2.15
SDI1: JP20.3 U5.15
SDI2: JP34.3 U8.15
SDI3: JP48.3 U11.15
SDI4: JP62.3 U14.15
SDI5: JP76.3 U17.15
SDI6: JP90.3 U20.15
SDI7: JP104.3 U23.15
SDI8: JP118.3 U26.15
SDO: JP2.2 U2.16
SDO1: JP20.2 U5.16
SDO2: JP34.2 U8.16
SDO3: JP48.2 U11.16
SDO4: JP62.2 U14.16
SDO5: JP76.2 U17.16
SDO6: JP90.2 U20.16
SDO7: JP104.2 U23.16
SDO8: JP118.2 U26.16
SEGA: R2.2 U3.11
SEGA1: R13.2 U4.11
SEGA2: R23.2 U7.11
SEGA3: R33.2 U10.11
SEGA4: R43.2 U13.11
SEGA5: R53.2 U16.11
SEGA6: R63.2 U19.11
SEGA7: R73.2 U22.11
SEGA8: R83.2 U25.11
SEGB: R3.2 U3.7
SEGB1: R14.2 U4.7
SEGB2: R24.2 U7.7
SEGB3: R34.2 U10.7
SEGB4: R44.2 U13.7
SEGB5: R54.2 U16.7
SEGB6: R64.2 U19.7
SEGB7: R74.2 U22.7
SEGB8: R84.2 U25.7
SEGC: R4.2 U3.4
SEGC1: R15.2 U4.4
SEGC2: R25.2 U7.4
SEGC3: R35.2 U10.4
SEGC4: R45.2 U13.4
SEGC5: R55.2 U16.4
SEGC6: R65.2 U19.4
SEGC7: R75.2 U22.4
SEGC8: R85.2 U25.4
SEGD: R5.2 U3.2
SEGD1: R16.2 U4.2
SEGD2: R26.2 U7.2
SEGD3: R36.2 U10.2
SEGD4: R46.2 U13.2
SEGD5: R56.2 U16.2
SEGD6: R66.2 U19.2
SEGD7: R76.2 U22.2
SEGD8: R86.2 U25.2
SEGDP: R9.2 U3.3
SEGDP1: R20.2 U4.3
SEGDP2: R30.2 U7.3
SEGDP3: R40.2 U10.3
SEGDP4: R50.2 U13.3
SEGDP5: R60.2 U16.3
SEGDP6: R70.2 U19.3
SEGDP7: R80.2 U22.3
SEGDP8: R90.2 U25.3
SEGE: R6.2 U3.1
SEGE1: R17.2 U4.1
SEGE2: R27.2 U7.1
SEGE3: R37.2 U10.1
SEGE4: R47.2 U13.1
SEGE5: R57.2 U16.1
SEGE6: R67.2 U19.1
SEGE7: R77.2 U22.1
SEGE8: R87.2 U25.1
SEGF: R7.2 U3.10
SEGF1: R18.2 U4.10
SEGF2: R28.2 U7.10
SEGF3: R38.2 U10.10
SEGF4: R48.2 U13.10
SEGF5: R58.2 U16.10
SEGF6: R68.2 U19.10
SEGF7: R78.2 U22.10
SEGF8: R88.2 U25.10
SEGG: R8.2 U3.5
SEGG1: R19.2 U4.5
SEGG2: R29.2 U7.5
SEGG3: R39.2 U10.5
SEGG4: R49.2 U13.5
SEGG5: R59.2 U16.5
SEGG6: R69.2 U19.5
SEGG7: R79.2 U22.5
SEGG8: R89.2 U25.5
TXO: JP1.RXI JP2.8 U2.31
TXO1: JP15.RXI JP20.8 U5.31
TXO2: JP29.RXI JP34.8 U8.31
TXO3: JP43.RXI JP48.8 U11.31
TXO4: JP57.RXI JP62.8 U14.31
TXO5: JP71.RXI JP76.8 U17.31
TXO6: JP85.RXI JP90.8 U20.31
TXO7: JP99.RXI JP104.8 U23.31
TXO8: JP113.RXI JP118.8 U26.31
VCC: C4.2 C10.1 C13.A JP1.VCC Q1.2 Q2.2 Q3.2 Q4.2 Q5.2 Q6.2 Q7.2 Q8.2 R1.2 R11.2 U1.5 U2.4 U2.6 U2.18
VCC1: C5.1 C6.A C7.2 JP15.VCC Q13.2 Q18.2 Q19.2 Q20.2 Q21.2 Q22.2 Q23.2 Q24.2 R10.2 R12.2 U5.4 U5.6 U5.18 U6.5
VCC2: C12.1 C14.A C15.2 JP29.VCC Q25.2 Q30.2 Q31.2 Q32.2 Q33.2 Q34.2 Q35.2 Q36.2 R21.2 R22.2 U8.4 U8.6 U8.18 U9.5
VCC3: C20.1 C21.A C22.2 JP43.VCC Q37.2 Q42.2 Q43.2 Q44.2 Q45.2 Q46.2 Q47.2 Q48.2 R31.2 R32.2 U11.4 U11.6 U11.18 U12.5
VCC4: C26.1 C27.A C28.2 JP57.VCC Q49.2 Q54.2 Q55.2 Q56.2 Q57.2 Q58.2 Q59.2 Q60.2 R41.2 R42.2 U14.4 U14.6 U14.18 U15.5
VCC5: C32.1 C33.A C34.2 JP71.VCC Q61.2 Q66.2 Q67.2 Q68.2 Q69.2 Q70.2 Q71.2 Q72.2 R51.2 R52.2 U17.4 U17.6 U17.18 U18.5
VCC6: C38.1 C39.A C40.2 JP85.VCC Q73.2 Q78.2 Q79.2 Q80.2 Q81.2 Q82.2 Q83.2 Q84.2 R61.2 R62.2 U20.4 U20.6 U20.18 U21.5
VCC7: C44.1 C45.A C46.2 JP99.VCC Q85.2 Q90.2 Q91.2 Q92.2 Q93.2 Q94.2 Q95.2 Q96.2 R71.2 R72.2 U23.4 U23.6 U23.18 U24.5
VCC8: C50.1 C51.A C52.2 JP113.VCC Q97.2 Q102.2 Q103.2 Q104.2 Q105.2 Q106.2 Q107.2 Q108.2 R81.2 R82.2 U26.4 U26.6 U26.18 U27.5

## Tracks (layer width: path | path; a pad name or v marks a point on that pad's centre or on a via)
!SS  (via drill 0.51)
  Top 0.203: U2.14 22.86,15.67 v22.86,15.24
  Bottom 0.203: v22.86,15.24 22.86,2.54 JP2.4
!SS1  (via drill 0.51)
  Top 0.203: U5.14 22.86,54.27 v22.86,53.85
  Bottom 0.203: v22.86,53.85 22.86,41.15 JP20.4
!SS2  (via drill 0.51)
  Top 0.203: U8.14 22.86,92.88 v22.86,92.46
  Bottom 0.203: v22.86,92.46 22.86,79.76 JP34.4
!SS3  (via drill 0.51)
  Top 0.203: U11.14 58.93,15.67 v58.93,15.24
  Bottom 0.203: v58.93,15.24 58.93,2.54 JP48.4
!SS4  (via drill 0.51)
  Top 0.203: U14.14 58.93,54.27 v58.93,53.85
  Bottom 0.203: v58.93,53.85 58.93,41.15 JP62.4
!SS5  (via drill 0.51)
  Top 0.203: U17.14 58.93,92.88 v58.93,92.46
  Bottom 0.203: v58.93,92.46 58.93,79.76 JP76.4
!SS6  (via drill 0.51)
  Top 0.203: U20.14 95,15.67 v95,15.24
  Bottom 0.203: v95,15.24 95,2.54 JP90.4
!SS7  (via drill 0.51)
  Top 0.203: U23.14 95,54.27 v95,53.85
  Bottom 0.203: v95,53.85 95,41.15 JP104.4
!SS8  (via drill 0.51)
  Top 0.203: U26.14 95,92.88 v95,92.46
  Bottom 0.203: v95,92.46 95,79.76 JP118.4
A1  (via drill 0.51)
  Top 0.203: U5.19 22.65,60.83 v24.13,60.83
  Bottom 0.203: JP22.2 26.67,65.28 24.13,62.74 v24.13,60.83
A2  (via drill 0.51)
  Top 0.203: U5.22 19.39,60.96 18.8,60.96 17.78,61.98 v17.78,64.01
  Bottom 0.203: JP23.2 6.35,65.28 7.62,64.01 v17.78,64.01
A3  (via drill 0.51)
  Top 0.203: U8.19 22.65,99.44 v24.13,99.44
  Bottom 0.203: JP36.2 26.67,103.89 24.13,101.35 v24.13,99.44
A4  (via drill 0.51)
  Top 0.203: U8.22 19.39,99.57 18.8,99.57 17.78,100.58 v17.78,102.62
  Bottom 0.203: JP37.2 6.35,103.89 7.62,102.62 v17.78,102.62
A5  (via drill 0.51)
  Top 0.203: U11.19 58.72,22.23 v60.2,22.23
  Bottom 0.203: JP50.2 62.74,26.67 60.2,24.13 v60.2,22.23
A6  (via drill 0.51)
  Top 0.203: U2.19 22.65,22.23 v24.13,22.23
  Bottom 0.203: JP9.2 26.67,26.67 24.13,24.13 v24.13,22.23
A7  (via drill 0.51)
  Top 0.203: U2.22 19.39,22.35 18.8,22.35 17.78,23.37 v17.78,25.4
  Bottom 0.203: JP10.2 6.35,26.67 7.62,25.4 v17.78,25.4
A8  (via drill 0.51)
  Top 0.203: U11.22 55.45,22.35 54.86,22.35 53.85,23.37 v53.85,25.4
  Bottom 0.203: JP51.2 42.42,26.67 43.69,25.4 v53.85,25.4
A9  (via drill 0.51)
  Top 0.203: U14.19 58.72,60.83 v60.2,60.83
  Bottom 0.203: JP64.2 62.74,65.28 60.2,62.74 v60.2,60.83
A10  (via drill 0.51)
  Top 0.203: U14.22 55.45,60.96 54.86,60.96 53.85,61.98 v53.85,64.01
  Bottom 0.203: JP65.2 42.42,65.28 43.69,64.01 v53.85,64.01
A11  (via drill 0.51)
  Top 0.203: U17.19 58.72,99.44 v60.2,99.44
  Bottom 0.203: JP78.2 62.74,103.89 60.2,101.35 v60.2,99.44
A12  (via drill 0.51)
  Top 0.203: U17.22 55.45,99.57 54.86,99.57 53.85,100.58 v53.85,102.62
  Bottom 0.203: JP79.2 42.42,103.89 43.69,102.62 v53.85,102.62
A13  (via drill 0.51)
  Top 0.203: U20.19 94.79,22.23 v96.27,22.23
  Bottom 0.203: JP92.2 98.81,26.67 96.27,24.13 v96.27,22.23
A14  (via drill 0.51)
  Top 0.203: U20.22 91.52,22.35 90.93,22.35 89.92,23.37 v89.92,25.4
  Bottom 0.203: JP93.2 78.49,26.67 79.76,25.4 v89.92,25.4
A15  (via drill 0.51)
  Top 0.203: U23.19 94.79,60.83 v96.27,60.83
  Bottom 0.203: JP106.2 98.81,65.28 96.27,62.74 v96.27,60.83
A16  (via drill 0.51)
  Top 0.203: U23.22 91.52,60.96 90.93,60.96 89.92,61.98 v89.92,64.01
  Bottom 0.203: JP107.2 78.49,65.28 79.76,64.01 v89.92,64.01
A17  (via drill 0.51)
  Top 0.203: U26.19 94.79,99.44 v96.27,99.44
  Bottom 0.203: JP120.2 98.81,103.89 96.27,101.35 v96.27,99.44
A18  (via drill 0.51)
  Top 0.203: U26.22 91.52,99.57 90.93,99.57 89.92,100.58 v89.92,102.62
  Bottom 0.203: JP121.2 78.49,103.89 79.76,102.62 v89.92,102.62
ANALOG  (via drill 0.51)
  Top 0.203: SJ2.1 v3.81,13.08 | U2.8 16.02,13.34 v15.24,13.34
  Bottom 0.203: v3.81,13.08 10.92,13.08 12.7,14.86 14.61,14.86 15.24,14.22 v15.24,13.34
ANALOG1  (via drill 0.51)
  Top 0.203: SJ3.1 v3.81,51.69 | U5.8 16.02,51.94 v15.24,51.94
  Bottom 0.203: v3.81,51.69 10.92,51.69 12.7,53.47 14.61,53.47 15.24,52.83 v15.24,51.94
ANALOG2  (via drill 0.51)
  Top 0.203: SJ5.1 v3.81,90.3 | U8.8 16.02,90.55 v15.24,90.55
  Bottom 0.203: v3.81,90.3 10.92,90.3 12.7,92.08 14.61,92.08 15.24,91.44 v15.24,90.55
ANALOG3  (via drill 0.51)
  Top 0.203: SJ7.1 v39.88,13.08 | U11.8 52.09,13.34 v51.31,13.34
  Bottom 0.203: v39.88,13.08 46.99,13.08 48.77,14.86 50.67,14.86 51.31,14.22 v51.31,13.34
ANALOG4  (via drill 0.51)
  Top 0.203: SJ9.1 v39.88,51.69 | U14.8 52.09,51.94 v51.31,51.94
  Bottom 0.203: v39.88,51.69 46.99,51.69 48.77,53.47 50.67,53.47 51.31,52.83 v51.31,51.94
ANALOG5  (via drill 0.51)
  Top 0.203: SJ11.1 v39.88,90.3 | U17.8 52.09,90.55 v51.31,90.55
  Bottom 0.203: v39.88,90.3 46.99,90.3 48.77,92.08 50.67,92.08 51.31,91.44 v51.31,90.55
ANALOG6  (via drill 0.51)
  Top 0.203: SJ13.1 v75.95,13.08 | U20.8 88.16,13.34 v87.38,13.34
  Bottom 0.203: v75.95,13.08 83.06,13.08 84.84,14.86 86.74,14.86 87.38,14.22 v87.38,13.34
ANALOG7  (via drill 0.51)
  Top 0.203: SJ15.1 v75.95,51.69 | U23.8 88.16,51.94 v87.38,51.94
  Bottom 0.203: v75.95,51.69 83.06,51.69 84.84,53.47 86.74,53.47 87.38,52.83 v87.38,51.94
ANALOG8  (via drill 0.51)
  Top 0.203: SJ17.1 v75.95,90.3 | U26.8 88.16,90.55 v87.38,90.55
  Bottom 0.203: v75.95,90.3 83.06,90.3 84.84,92.08 86.74,92.08 87.38,91.44 v87.38,90.55
C-DIG1  (via drill 0.51)
  Top 0.203: U2.13 20.32,17.08 v20.32,17.78 | Q9.1 26.99,25.59 27.94,24.64 v27.94,22.86
  Bottom 0.203: v27.94,22.86 27.94,22.35 27.18,21.59 27.18,19.56 25.15,17.53 20.57,17.53 v20.32,17.78
C-DIG2
  Top 0.203: U2.25 16.15,24.64 14.86,24.64 14.29,25.21 Q10.1
C-DIG3
  Top 0.203: U2.26 15.53,24.13 14.61,24.13 13.97,24.77 10.79,24.77 10.48,25.08 Q11.1
C-DIG4
  Top 0.203: U2.1 12.77,17.84 8.57,13.65 Q12.1
C-DIG5  (via drill 0.51)
  Top 0.203: U5.13 20.32,55.68 v20.32,56.39 | Q14.1 26.99,64.2 27.94,63.25 v27.94,61.47
  Bottom 0.203: v27.94,61.47 27.94,60.96 27.18,60.2 27.18,58.17 25.15,56.13 20.57,56.13 v20.32,56.39
C-DIG6
  Top 0.203: U5.25 16.15,63.25 14.86,63.25 14.29,63.81 Q15.1
C-DIG7
  Top 0.203: U5.26 15.53,62.74 14.61,62.74 13.97,63.37 10.79,63.37 10.48,63.69 Q16.1
C-DIG8
  Top 0.203: U5.1 12.77,56.45 8.57,52.26 Q17.1
C-DIG9  (via drill 0.51)
  Top 0.203: U8.13 20.32,94.29 v20.32,95 | Q26.1 26.99,102.8 27.94,101.85 v27.94,100.08
  Bottom 0.203: v27.94,100.08 27.94,99.57 27.18,98.81 27.18,96.77 25.15,94.74 20.57,94.74 v20.32,95
C-DIG10
  Top 0.203: U8.25 16.15,101.85 14.86,101.85 14.29,102.42 Q27.1
C-DIG11
  Top 0.203: U8.26 15.53,101.35 14.61,101.35 13.97,101.98 10.79,101.98 10.48,102.3 Q28.1
C-DIG12
  Top 0.203: U8.1 12.77,95.06 8.57,90.87 Q29.1
C-DIG13  (via drill 0.51)
  Top 0.203: U11.13 56.39,17.08 v56.39,17.78 | Q38.1 63.06,25.59 64.01,24.64 v64.01,22.86
  Bottom 0.203: v64.01,22.86 64.01,22.35 63.25,21.59 63.25,19.56 61.21,17.53 56.64,17.53 v56.39,17.78
C-DIG14
  Top 0.203: U11.25 52.22,24.64 50.93,24.64 50.36,25.21 Q39.1
C-DIG15
  Top 0.203: U11.26 51.6,24.13 50.67,24.13 50.04,24.77 46.86,24.77 46.55,25.08 Q40.1
C-DIG16
  Top 0.203: U11.1 48.83,17.84 44.64,13.65 Q41.1
C-DIG17  (via drill 0.51)
  Top 0.203: U14.13 56.39,55.68 v56.39,56.39 | Q50.1 63.06,64.2 64.01,63.25 v64.01,61.47
  Bottom 0.203: v64.01,61.47 64.01,60.96 63.25,60.2 63.25,58.17 61.21,56.13 56.64,56.13 v56.39,56.39
C-DIG18
  Top 0.203: U14.25 52.22,63.25 50.93,63.25 50.36,63.81 Q51.1
C-DIG19
  Top 0.203: U14.26 51.6,62.74 50.67,62.74 50.04,63.37 46.86,63.37 46.55,63.69 Q52.1
C-DIG20
  Top 0.203: U14.1 48.83,56.45 44.64,52.26 Q53.1
C-DIG21  (via drill 0.51)
  Top 0.203: U17.13 56.39,94.29 v56.39,95 | Q62.1 63.06,102.8 64.01,101.85 v64.01,100.08
  Bottom 0.203: v64.01,100.08 64.01,99.57 63.25,98.81 63.25,96.77 61.21,94.74 56.64,94.74 v56.39,95
C-DIG22
  Top 0.203: U17.25 52.22,101.85 50.93,101.85 50.36,102.42 Q63.1
C-DIG23
  Top 0.203: U17.26 51.6,101.35 50.67,101.35 50.04,101.98 46.86,101.98 46.55,102.3 Q64.1
C-DIG24
  Top 0.203: U17.1 48.83,95.06 44.64,90.87 Q65.1
C-DIG25  (via drill 0.51)
  Top 0.203: U20.13 92.46,17.08 v92.46,17.78 | Q74.1 99.13,25.59 100.08,24.64 v100.08,22.86
  Bottom 0.203: v100.08,22.86 100.08,22.35 99.31,21.59 99.31,19.56 97.28,17.53 92.71,17.53 v92.46,17.78
C-DIG26
  Top 0.203: U20.25 88.29,24.64 87,24.64 86.43,25.21 Q75.1
C-DIG27
  Top 0.203: U20.26 87.66,24.13 86.74,24.13 86.11,24.77 82.93,24.77 82.62,25.08 Q76.1
C-DIG28
  Top 0.203: U20.1 84.9,17.84 80.71,13.65 Q77.1
C-DIG29  (via drill 0.51)
  Top 0.203: U23.13 92.46,55.68 v92.46,56.39 | Q86.1 99.13,64.2 100.08,63.25 v100.08,61.47
  Bottom 0.203: v100.08,61.47 100.08,60.96 99.31,60.2 99.31,58.17 97.28,56.13 92.71,56.13 v92.46,56.39
C-DIG30
  Top 0.203: U23.25 88.29,63.25 87,63.25 86.43,63.81 Q87.1
C-DIG31
  Top 0.203: U23.26 87.66,62.74 86.74,62.74 86.11,63.37 82.93,63.37 82.62,63.69 Q88.1
C-DIG32
  Top 0.203: U23.1 84.9,56.45 80.71,52.26 Q89.1
C-DIG33  (via drill 0.51)
  Top 0.203: U26.13 92.46,94.29 v92.46,95 | Q98.1 99.13,102.8 100.08,101.85 v100.08,100.08
  Bottom 0.203: v100.08,100.08 100.08,99.57 99.31,98.81 99.31,96.77 97.28,94.74 92.71,94.74 v92.46,95
C-DIG34
  Top 0.203: U26.25 88.29,101.85 87,101.85 86.43,102.42 Q99.1
C-DIG35
  Top 0.203: U26.26 87.66,101.35 86.74,101.35 86.11,101.98 82.93,101.98 82.62,102.3 Q100.1
C-DIG36
  Top 0.203: U26.1 84.9,95.06 80.71,90.87 Q101.1
C-SEGA
  Top 0.254: U2.23 20.67,24.77 22.27,24.77 Q1.1
C-SEGA1
  Top 0.254: U5.23 20.67,63.37 22.27,63.37 Q13.1
C-SEGA2
  Top 0.254: U8.23 20.67,101.98 22.27,101.98 Q25.1
C-SEGA3
  Top 0.254: U11.23 56.73,24.77 58.34,24.77 Q37.1
C-SEGA4
  Top 0.254: U14.23 56.73,63.37 58.34,63.37 Q49.1
C-SEGA5
  Top 0.254: U17.23 56.73,101.98 58.34,101.98 Q61.1
C-SEGA6
  Top 0.254: U20.23 92.8,24.77 94.41,24.77 Q73.1
C-SEGA7
  Top 0.254: U23.23 92.8,63.37 94.41,63.37 Q85.1
C-SEGA8
  Top 0.254: U26.23 92.8,101.98 94.41,101.98 Q97.1
C-SEGB
  Top 0.203: Q2.1 6.67,25.33 11.05,20.95 11.91,20.95 U2.32
C-SEGB1
  Top 0.203: Q18.1 6.67,63.94 11.05,59.56 11.91,59.56 U5.32
C-SEGB2
  Top 0.203: Q30.1 6.67,102.55 11.05,98.17 11.91,98.17 U8.32
C-SEGB3
  Top 0.203: Q42.1 42.74,25.33 47.12,20.95 47.98,20.95 U11.32
C-SEGB4
  Top 0.203: Q54.1 42.74,63.94 47.12,59.56 47.98,59.56 U14.32
C-SEGB5
  Top 0.203: Q66.1 42.74,102.55 47.12,98.17 47.98,98.17 U17.32
C-SEGB6
  Top 0.203: Q78.1 78.81,25.33 83.19,20.95 84.05,20.95 U20.32
C-SEGB7
  Top 0.203: Q90.1 78.81,63.94 83.19,59.56 84.05,59.56 U23.32
C-SEGB8
  Top 0.203: Q102.1 78.81,102.55 83.19,98.17 84.05,98.17 U26.32
C-SEGC
  Top 0.203: U2.12 19.75,16.51 19.05,16.51 17.78,15.24 17.78,13.08 17.13,12.43 Q3.1
C-SEGC1
  Top 0.203: U5.12 19.75,55.12 19.05,55.12 17.78,53.85 17.78,51.69 17.13,51.04 Q19.1
C-SEGC2
  Top 0.203: U8.12 19.75,93.73 19.05,93.73 17.78,92.46 17.78,90.3 17.13,89.65 Q31.1
C-SEGC3
  Top 0.203: U11.12 55.82,16.51 55.12,16.51 53.85,15.24 53.85,13.08 53.2,12.43 Q43.1
C-SEGC4
  Top 0.203: U14.12 55.82,55.12 55.12,55.12 53.85,53.85 53.85,51.69 53.2,51.04 Q55.1
C-SEGC5
  Top 0.203: U17.12 55.82,93.73 55.12,93.73 53.85,92.46 53.85,90.3 53.2,89.65 Q67.1
C-SEGC6
  Top 0.203: U20.12 91.89,16.51 91.19,16.51 89.92,15.24 89.92,13.08 89.27,12.43 Q79.1
C-SEGC7
  Top 0.203: U23.12 91.89,55.12 91.19,55.12 89.92,53.85 89.92,51.69 89.27,51.04 Q91.1
C-SEGC8
  Top 0.203: U26.12 91.89,93.73 91.19,93.73 89.92,92.46 89.92,90.3 89.27,89.65 Q103.1
C-SEGD
  Top 0.203: U2.10 20.16,13.84 24.77,13.84 25.08,13.53 Q4.1
C-SEGD1
  Top 0.203: U5.10 20.16,52.45 24.77,52.45 25.08,52.14 Q20.1
C-SEGD2
  Top 0.203: U8.10 20.16,91.06 24.77,91.06 25.08,90.74 Q32.1
C-SEGD3
  Top 0.203: U11.10 56.23,13.84 60.83,13.84 61.15,13.53 Q44.1
C-SEGD4
  Top 0.203: U14.10 56.23,52.45 60.83,52.45 61.15,52.14 Q56.1
C-SEGD5
  Top 0.203: U17.10 56.23,91.06 60.83,91.06 61.15,90.74 Q68.1
C-SEGD6
  Top 0.203: U20.10 92.3,13.84 96.9,13.84 97.22,13.53 Q80.1
C-SEGD7
  Top 0.203: U23.10 92.3,52.45 96.9,52.45 97.22,52.14 Q92.1
C-SEGD8
  Top 0.203: U26.10 92.3,91.06 96.9,91.06 97.22,90.74 Q104.1
C-SEGDP
  Top 0.203: U2.9 19.54,13.34 20.95,13.34 21.27,13.02 Q8.1
C-SEGDP1
  Top 0.203: U5.9 19.54,51.94 20.95,51.94 21.27,51.63 Q24.1
C-SEGDP2
  Top 0.203: U8.9 19.54,90.55 20.95,90.55 21.27,90.24 Q36.1
C-SEGDP3
  Top 0.203: U11.9 55.6,13.34 57.02,13.34 57.34,13.02 Q48.1
C-SEGDP4
  Top 0.203: U14.9 55.6,51.94 57.02,51.94 57.34,51.63 Q60.1
C-SEGDP5
  Top 0.203: U17.9 55.6,90.55 57.02,90.55 57.34,90.24 Q72.1
C-SEGDP6
  Top 0.203: U20.9 91.67,13.34 93.09,13.34 93.41,13.02 Q84.1
C-SEGDP7
  Top 0.203: U23.9 91.67,51.94 93.09,51.94 93.41,51.63 Q96.1
C-SEGDP8
  Top 0.203: U26.9 91.67,90.55 93.09,90.55 93.41,90.24 Q108.1
C-SEGE
  Top 0.203: U2.11 20.72,14.41 28.13,14.41 28.89,13.65 Q5.1
C-SEGE1
  Top 0.203: U5.11 20.72,53.02 28.13,53.02 28.89,52.26 Q21.1
C-SEGE2
  Top 0.203: U8.11 20.72,91.63 28.13,91.63 28.89,90.87 Q33.1
C-SEGE3
  Top 0.203: U11.11 56.79,14.41 64.2,14.41 64.96,13.65 Q45.1
C-SEGE4
  Top 0.203: U14.11 56.79,53.02 64.2,53.02 64.96,52.26 Q57.1
C-SEGE5
  Top 0.203: U17.11 56.79,91.63 64.2,91.63 64.96,90.87 Q69.1
C-SEGE6
  Top 0.203: U20.11 92.85,14.41 100.27,14.41 101.03,13.65 Q81.1
C-SEGE7
  Top 0.203: U23.11 92.85,53.02 100.27,53.02 101.03,52.26 Q93.1
C-SEGE8
  Top 0.203: U26.11 92.85,91.63 100.27,91.63 101.03,90.87 Q105.1
C-SEGF
  Top 0.203: U2.24 19.37,24.6 Q6.1
C-SEGF1
  Top 0.203: U5.24 19.37,63.21 Q22.1
C-SEGF2
  Top 0.203: U8.24 19.37,101.82 Q34.1
C-SEGF3
  Top 0.203: U11.24 55.44,24.6 Q46.1
C-SEGF4
  Top 0.203: U14.24 55.44,63.21 Q58.1
C-SEGF5
  Top 0.203: U17.24 55.44,101.82 Q70.1
C-SEGF6
  Top 0.203: U20.24 91.51,24.6 Q82.1
C-SEGF7
  Top 0.203: U23.24 91.51,63.21 Q94.1
C-SEGF8
  Top 0.203: U26.24 91.51,101.82 Q106.1
C-SEGG